# EAGLE board lasersupply_smd (EAGLE 5.11)
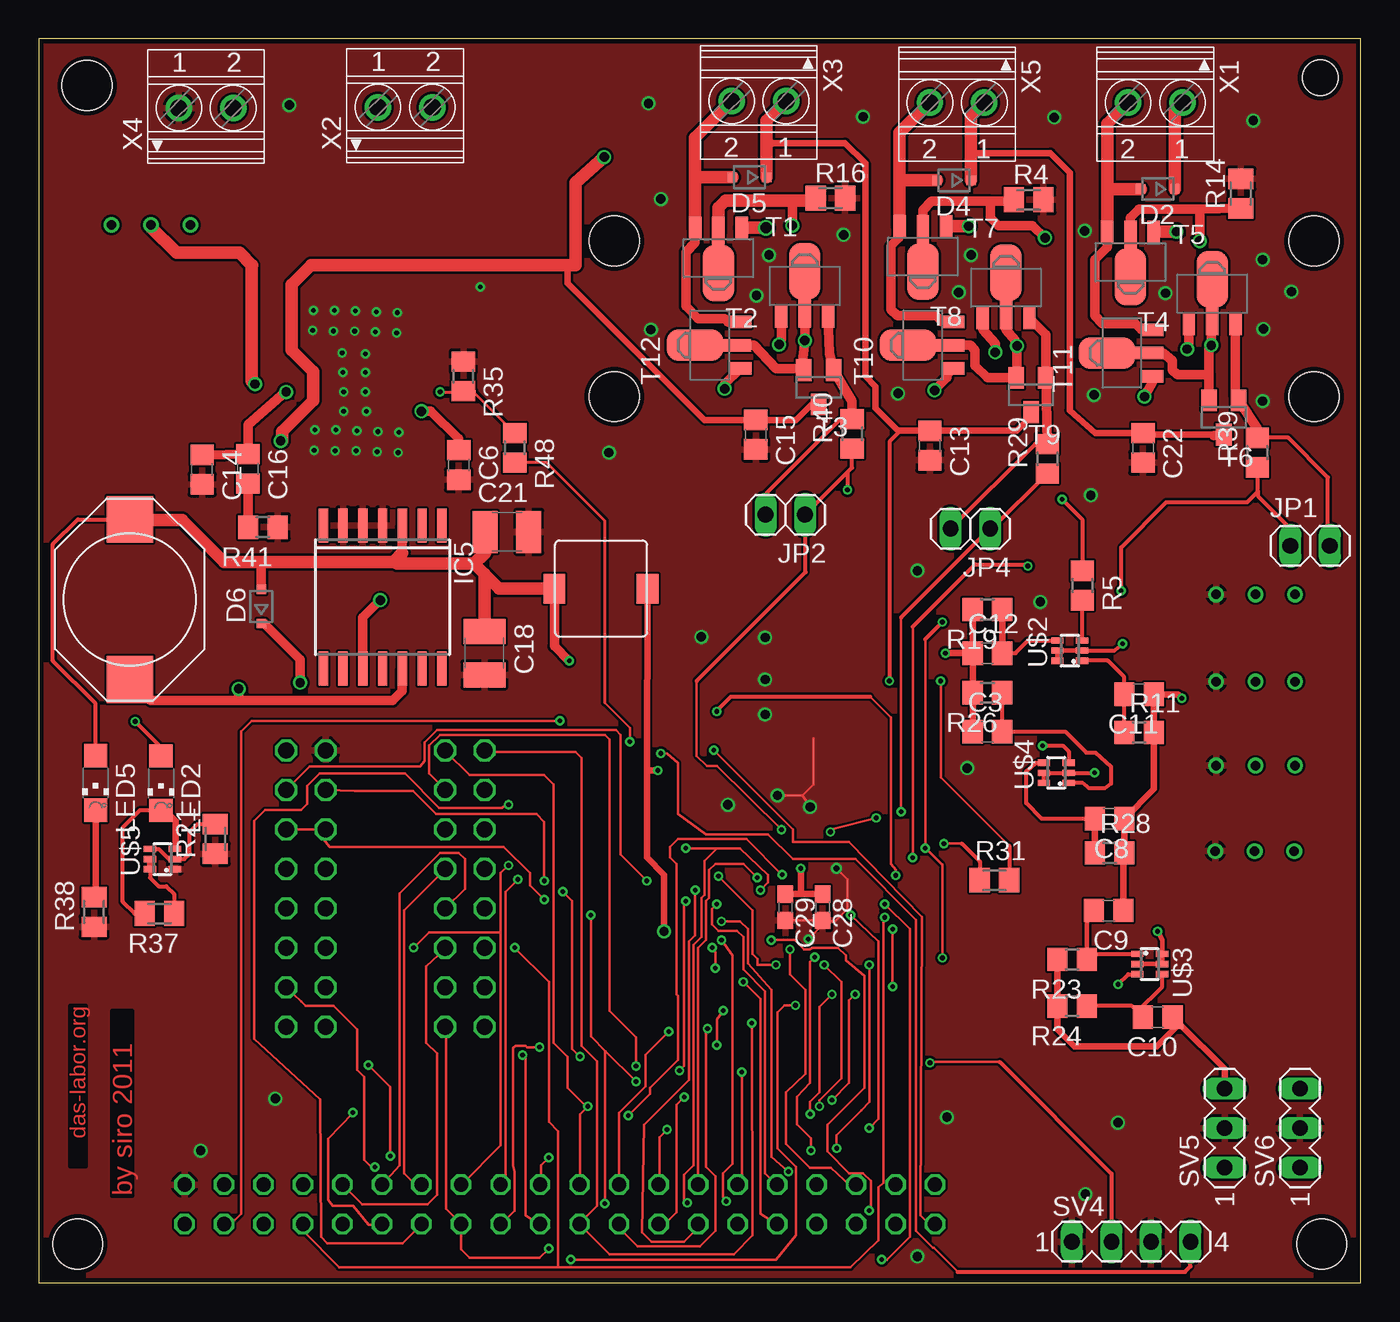
[diagram p0: board, top side]
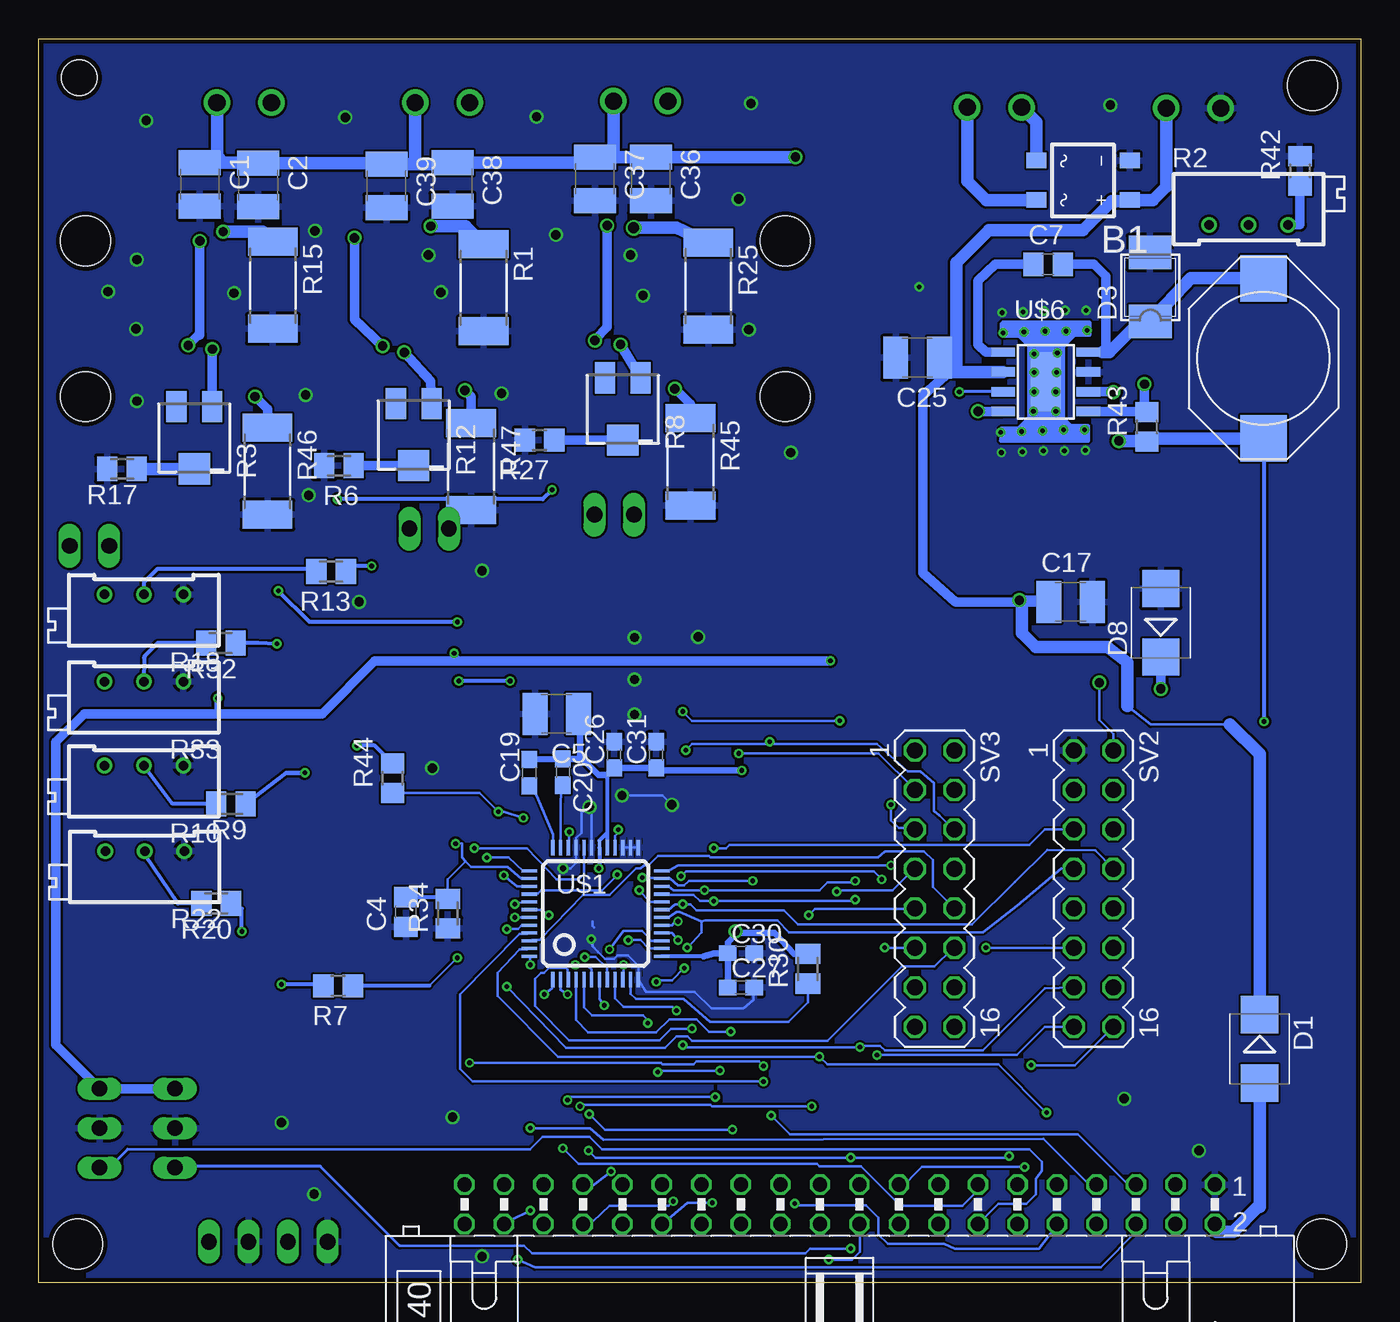
[diagram p1: board, bottom side, seen from below]

Size 85 x 80 mm. Coordinates in mm from the lower left corner, seen from the top.
Outline: 0,0 85,0 85,80 0,80 0,0
Copper layers (1*16): Top 0.035mm / dielectric 1.5mm / Bottom 0.035mm
Design rules "PCB-POOL Standard": minimum track width 0.15mm, minimum drill 0.3mm, track to track 0.15mm, track to pad 0.15mm, pad to pad 0.15mm, via to via 0.15mm, smd to smd 0.15mm, copper to edge 0.3mm, drill to drill 0.2mm, minimum pad ring 0.2mm, minimum via ring 0.15mm, stop-mask expansion 0.075mm, vias tented up to drill 0mil, thermal gap 0.2mm
Holes 3.2 mm at 82.5,2.5 82,57 3.1,77 2.5,2.5 37,57 37,67 82,67
Holes 2.3 mm at 82.4,77.5

## Footprints (pad centres in the part's own frame; a part is rotated, then mirrored left to right if it is on the bottom)
MBS = smd 1 x 1.3: + -1.27,-3; - 1.27,-3; AC1 -1.27,3; AC2 1.27,3
C1210 = smd 1.6 x 2.7: 1 -1.4,0; 2 1.4,0
C0805 = smd 1.3 x 1.5: 1 -0.95,0; 2 0.95,0
C0603 = smd 1.1 x 1: 1 -0.85,0; 2 0.85,0
SMB = smd 2.4 x 2.4: A 2.2,0; C -2.2,0
SOD323-R = smd 0.6 x 0.6: A 1.1,0; C -1.1,0
SMB' = smd 2.159 x 2.743: 1 -2.311,-0.127; 2 2.108,-0.102
SO14W = smd 0.6 x 2.2: 1 -3.81,-4.6; 2 -2.54,-4.6; 3 -1.27,-4.6; 4 0,-4.6; 5 1.27,-4.6; 6 2.54,-4.6; 7 3.81,-4.6; 8 3.81,4.6; 9 2.54,4.6; 10 1.27,4.6; 11 0,4.6; 12 -1.27,4.6; 13 -2.54,4.6; 14 -3.81,4.6
1X02 = drill 1.016 long: 1 -1.27,0; 2 1.27,0
PISM = smd 3 x 3: 1 -5.15,0; 2 5.15,0
PIS24XX = smd 1.4 x 1.9: 1 -3,0; 2 3,0
CHIPLED_1206 = smd 1.5 x 1.5: A 0,-1.75; C 0,1.75
R2512 = smd 1.8 x 3.2: 1 -2.8,0; 2 2.8,0
RTRIM64X = drill 0.61 round: 1 1.27,-2.54; 2 1.27,0; 3 1.27,2.54
SM-42/43A = smd 2 x 1.3: 1 2,1.15; 3 2,-1.15 | smd 2 x 2: 2 -2,0
M0805 = smd 1.3 x 1.6: 1 -0.95,0; 2 0.95,0
R0805 = smd 1.3 x 1.5: 1 -0.95,0; 2 0.95,0
ML40L = drill 0.914 octagon: 1 -24.13,-1.27; 2 -24.13,1.27; 3 -21.59,-1.27; 4 -21.59,1.27; 5 -19.05,-1.27; 6 -19.05,1.27; 7 -16.51,-1.27; 8 -16.51,1.27; 9 -13.97,-1.27; 10 -13.97,1.27; 11 -11.43,-1.27; 12 -11.43,1.27; 13 -8.89,-1.27; 14 -8.89,1.27; 15 -6.35,-1.27; 16 -6.35,1.27; 17 -3.81,-1.27; 18 -3.81,1.27; 19 -1.27,-1.27; 20 -1.27,1.27; 21 1.27,-1.27; 22 1.27,1.27; 23 3.81,-1.27; 24 3.81,1.27; 25 6.35,-1.27; 26 6.35,1.27; 27 8.89,-1.27; 28 8.89,1.27; 29 11.43,-1.27; 30 11.43,1.27; 31 13.97,-1.27; 32 13.97,1.27; 33 16.51,-1.27; 34 16.51,1.27; 35 19.05,-1.27; 36 19.05,1.27; 37 21.59,-1.27; 38 21.59,1.27; 39 24.13,-1.27; 40 24.13,1.27
MA08-2 = drill 1.016 octagon: 1 -8.89,-1.27; 2 -8.89,1.27; 3 -6.35,-1.27; 4 -6.35,1.27; 5 -3.81,-1.27; 6 -3.81,1.27; 7 -1.27,-1.27; 8 -1.27,1.27; 9 1.27,-1.27; 10 1.27,1.27; 11 3.81,-1.27; 12 3.81,1.27; 13 6.35,-1.27; 14 6.35,1.27; 15 8.89,-1.27; 16 8.89,1.27
MA04-1 = drill 1.016 long: 1 -3.81,0; 2 -1.27,0; 3 1.27,0; 4 3.81,0
MA03-1 = drill 1.016 long: 1 -2.54,0; 2 0,0; 3 2.54,0
SOT89-BEC = smd 0.8 x 1.4: B -1.499,-0.711; C 1.499,-0.711 | smd 0.8 x 1.9: E 0,-0.457 | smd 2.032 x 3.65: E@1 0,2.21
SOT23 = smd 1 x 1.4: 1 -0.95,-1.1; 2 0.95,-1.1; 3 0,1.1
LQFP48 = smd 0.2 x 1: 1 -2.75,-4.25; 2 -2.25,-4.25; 3 -1.75,-4.25; 4 -1.25,-4.25; 5 -0.75,-4.25; 6 -0.25,-4.25; 7 0.25,-4.25; 8 0.75,-4.25; 9 1.25,-4.25; 10 1.75,-4.25; 11 2.25,-4.25; 12 2.75,-4.25; 25 2.75,4.25; 26 2.25,4.25; 27 1.75,4.25; 28 1.25,4.25; 29 0.75,4.25; 30 0.25,4.25; 31 -0.25,4.25; 32 -0.75,4.25; 33 -1.25,4.25; 34 -1.75,4.25; 35 -2.25,4.25; 36 -2.75,4.25 | smd 1 x 0.2: 13 4.25,-2.75; 14 4.25,-2.25; 15 4.25,-1.75; 16 4.25,-1.25; 17 4.25,-0.75; 18 4.25,-0.25; 19 4.25,0.25; 20 4.25,0.75; 21 4.25,1.25; 22 4.25,1.75; 23 4.25,2.25; 24 4.25,2.75; 37 -4.25,2.75; 38 -4.25,2.25; 39 -4.25,1.75; 40 -4.25,1.25; 41 -4.25,0.75; 42 -4.25,0.25; 43 -4.25,-0.25; 44 -4.25,-0.75; 45 -4.25,-1.25; 46 -4.25,-1.75; 47 -4.25,-2.25; 48 -4.25,-2.75
SOT363_PHILIPS = smd 0.4 x 0.8: 1 -0.65,-0.8; 2 0,-0.8; 3 0.65,-0.8; 4 0.65,0.8; 5 0,0.8; 6 -0.65,0.8
SO8-COOL = smd 0.61 x 1.524: 1 -1.905,-2.743; 2 -0.635,-2.743; 3 0.635,-2.743; 4 1.905,-2.743; 5 1.905,2.743; 6 0.635,2.743; 7 -0.635,2.743; 8 -1.905,2.743 | smd 3.81 x 1.93: EXT 0,0
1751248 = drill 1.1 pad 1.7 round: 1 -1.75,-0.1; 2 1.75,-0.1

## Placement (x,y rotation side)
B1  B1S  [MBS]  17.85,70.9 90 bottom
C1  X5R-G1210 22  [C1210]  74.65,70.65 270 bottom
C2  X5R-G1210 22  [C1210]  70.9,70.6 270 bottom
C3  100n  [C0805]  61,35.45 0 top
C4  100n  [C0805]  61.4,23.85 90 bottom
C5  100µ  [C1210]  51.7,36.6 180 bottom
C6  15n  [C0805]  27,52.6 270 top
C7  100n  [C0805]  20.1,65.5 0 bottom
C8  100n  [C0805]  68.85,29.85 180 top
C9  100n  [C0805]  68.8,23.95 180 top
C10  100n  [C0805]  71.95,17.1 180 top
C11  100n  [C0805]  70.75,37.85 180 top
C12  100n  [C0805]  61,40.5 0 top
C13  X5R-G0805 4,7  [C0805]  57.3,53.85 270 top
C14  12p  [C0805]  10.5,52.3 270 top
C15  X5R-G0805 4,7  [C0805]  46.1,54.55 270 top
C16  200p  [C0805]  13.45,52.35 270 top
C17  10u, 60V max  [C1210]  18.65,43.8 0 bottom
C18  X5R-G1210 22  [C1210]  28.65,40.5 270 top
C19  100n  [C0603]  53.45,32.8 90 bottom
C20  100n  [C0603]  51.3,32.85 270 bottom
C21  X5R-G1210 22  [C1210]  30.1,48.3 0 top
C22  X5R-G0805 4,7  [C0805]  71,53.7 270 top
C25  10µ  [C1210]  28.5,59.5 180 bottom
C26  10n  [C0603]  48,33.95 90 bottom
C27  10n  [C0603]  39.85,19 0 bottom
C28  10n  [C0603]  50.4,24.15 270 top
C29  100n  [C0603]  48,24.15 270 top
C30  100n  [C0603]  39.85,21.2 0 bottom
C31  100n  [C0603]  45.3,33.95 90 bottom
C36  X5R-G1210 22  [C1210]  45.65,71 270 bottom
C37  X5R-G1210 22  [C1210]  49.25,71 270 bottom
C38  X5R-G1210 22  [C1210]  58.4,70.65 270 bottom
C39  X5R-G1210 22  [C1210]  62.65,70.55 270 bottom
D1  [SMB]  6.5,15.05 270 bottom
D2  ES2D  [SOD323-R]  71.95,70.35 180 top
D3  [SMB']  13.65,64.15 90 bottom
D4  ES2D  [SOD323-R]  58.85,70.9 180 top
D5  ES2D  [SOD323-R]  45.7,71.1 180 top
D6  ES2D  [SOD323-R]  14.3,43.5 90 top
D8  [SMB]  12.85,42.45 90 bottom
IC5  LM2574HVM-5.0  [SO14W]  22.1,44.1 180 top
JP1  [1X02]  81.75,47.4 0 top
JP2  [1X02]  48,49.4 180 top
JP4  [1X02]  59.9,48.5 180 top
L2  L-EUPISM 10µ  [PISM]  6.25,59.45 270 bottom
L4  22µ  [PIS24XX]  36.15,44.65 0 top
L5  L-PISM 680µ  [PISM]  5.85,43.95 90 top
LED2  [CHIPLED_1206]  7.86,32.13 180 top
LED5  [CHIPLED_1206]  3.65,32.15 180 top
R1  PT2.0YCT-ND - 2ohm  [R2512]  56.4,64 270 bottom
R2  1k - PV36X50  [RTRIM64X]  7.2,69.3 270 bottom
R3  100- ST32ETB101  [SM-42/43A]  75,54.35 90 bottom
R4  1k  [M0805]  63.65,69.65 0 top
R5  0  [R0805]  67.1,44.85 270 top
R6  2  [M0805]  65.7,52.55 180 bottom
R7  0  [R0805]  65.75,19.1 180 bottom
R8  100 - ST32ETB101  [SM-42/43A]  47.45,56.2 90 bottom
R9  700  [M0805]  72.65,30.8 180 bottom
R10  100k - PV36X104  [RTRIM64X]  78.25,32 90 bottom
R11  160  [R0805]  70.75,35.4 0 top
R12  100 - ST32ETB101  [SM-42/43A]  60.9,54.55 90 bottom
R13  530 1%  [M0805]  66.2,45.75 180 bottom
R14  1k  [M0805]  77.3,70.05 90 top
R15  PT2.0YCT-ND - 2ohm  [R2512]  69.95,64.15 270 bottom
R16  1k  [M0805]  50.9,69.75 0 top
R17  2  [M0805]  79.65,52.35 180 bottom
R18  1k - PV36X102  [RTRIM64X]  78.25,43 90 bottom
R19  160  [R0805]  61,43.3 180 top
R20  700  [M0805]  73.6,24.4 180 bottom
R21  62  [M0805]  11.35,28.55 90 top
R22  100k - PV36X104  [RTRIM64X]  78.19,26.5 90 bottom
R23  160  [R0805]  66.45,20.8 180 top
R24  160  [R0805]  66.45,17.8 180 top
R25  PT2.0YCT-ND -2ohm  [R2512]  41.95,64.1 270 bottom
R26  160  [R0805]  61,37.95 180 top
R27  2  [R0805]  52.8,54.2 180 bottom
R28  160  [R0805]  68.85,27.65 0 top
R29  1  [R0805]  64.85,53 90 top
R30  1k  [M0805]  35.55,20.2 90 bottom
R31  10k  [M0805]  61.45,25.9 0 top
R32  700  [M0805]  73.3,41.15 180 bottom
R33  100k - PV36X104  [RTRIM64X]  78.25,37.4 90 bottom
R34  10k  [M0805]  58.7,23.75 90 bottom
R35  34k  [R0805]  27.3,58.3 270 top
R37  4k7  [M0805]  7.75,23.75 180 top
R38  1.2k  [M0805]  3.55,23.85 90 top
R39  1  [R0805]  78.35,53.4 90 top
R40  1  [R0805]  52.3,54.6 90 top
R41  191k  [R0805]  14.4,48.6 180 top
R42  700  [R0805]  3.9,71.5 90 bottom
R43  10k  [R0805]  13.75,55.05 90 bottom
R44  0  [R0805]  62.25,32.45 90 bottom
R45  PT2.0YCT-ND -2ohm  [R2512]  43.1,52.8 270 bottom
R46  PT2.0YCT-ND - 2ohm  [R2512]  70.3,52.2 270 bottom
R47  PT2.0YCT-ND - 2ohm  [R2512]  57.2,52.5 270 bottom
R48  50k  [R0805]  30.6,53.7 270 top
SV1  [ML40L]  33.5,5.05 180 bottom
SV2  [MA08-2]  17.18,25.35 270 bottom
SV3  [MA08-2]  27.4,25.35 270 bottom
SV4  [MA04-1]  70.25,2.65 0 top
SV5  [MA03-1]  76.25,9.95 90 top
SV6  [MA03-1]  81.1,9.95 90 top
T1  NESG270034  [SOT89-BEC]  49.25,62.85 0 top
T2  NESG270034  [SOT89-BEC]  43.7,67.15 180 top
T3  BC847  [SOT23]  50.15,57.6 180 top
T4  NESG270034  [SOT89-BEC]  70.2,66.9 180 top
T5  NESG270034  [SOT89-BEC]  75.45,62.35 0 top
T6  BC847  [SOT23]  76.2,55.65 180 top
T7  NESG270034  [SOT89-BEC]  62.2,62.75 0 top
T8  NESG270034  [SOT89-BEC]  56.85,67.25 180 top
T9  BC847  [SOT23]  63.8,57.1 180 top
T10  NESG270034  [SOT89-BEC]  58.1,60.3 90 top
T11  NESG270034  [SOT89-BEC]  70.9,59.8 90 top
T12  NESG270034  [SOT89-BEC]  44.4,60.3 90 top
U$1  ADV7123  [LQFP48]  49.2,23.75 0 bottom
U$2  MMDT3906SOT363  [SOT363_PHILIPS]  66.3,40.66 90 top
U$3  MMDT3906SOT363  [SOT363_PHILIPS]  71.44,20.5 270 top
U$4  MMDT3906SOT363  [SOT363_PHILIPS]  65.43,32.8 90 top
U$5  MMDT3904  [SOT363_PHILIPS]  7.95,27.25 90 top
U$6  TPS54332  [SO8-COOL]  20.25,57.95 270 bottom
X1  1751248  [1751248]  71.8,75.8 180 top
X2  1751248  [1751248]  23.55,75.7 0 top
X3  1751248  [1751248]  46.3,75.9 180 top
X4  1751248  [1751248]  10.75,75.65 0 top
X5  1751248  [1751248]  59.05,75.8 180 top

## Library data of the parts
B1 = rectifier
C1-C22 C25-C31 C36-C39 R2 R5-R7 R10 R11 R13 R18 R19 R21-R24 R26-R31 R33-R35 R37-R44 R48 = rcl
D1 D2 D4-D6 D8 = diode
D3 = semicon-smd-ipc
IC5 = linear
JP1 JP2 JP4 = pinhead
L2 L4 L5 = Inductor-Fastron
LED2 LED5 = led
R1 R4 R9 R14-R17 R20 R25 R32 R45-R47 = resistor
R3 R8 R12 = pot
SV1 = con-ml; OC_FARNELL: unknown; OC_NEWARK: unknown
SV2-SV6 = con-lstb; OC_FARNELL: unknown; OC_NEWARK: unknown
T1 T2 T4 T5 T7 T8 T10-T12 U$1-U$6 = Labor
T3 T6 T9 = transistor
X1-X5 = con-phoenix-350

## Nets
+5V: C3.1 C8.1 C9.1 C10.1 C11.1 C12.1 C18.1 C21.1 D6.A IC5.3 L4.1 L5.2 LED5.A R11.2 R19.2 R23.2 R24.2 R26.2 R28.2 SV5.3 SV6.3
A0: SV1.4 U$1.39
A1: SV1.5 U$1.40
A2: SV1.6 U$1.41
A3: SV1.7 U$1.42
A4: SV1.8 SV3.11 U$1.43
A5: SV1.9 SV3.12 U$1.44
A6: SV1.10 SV3.9 U$1.45
A7: SV1.11 SV3.10 U$1.46
A8: SV1.12 SV3.7 U$1.47
A9: SV1.13 SV3.8 U$1.48
A_OUT: JP4.1 R29.1 R44.1 U$1.34
B0: SV1.26 U$1.1
B1: SV1.25 U$1.2
B2: SV1.24 U$1.3
B3: SV1.23 U$1.4
B4: SV1.22 SV3.1 U$1.5
B5: SV1.21 SV3.2 U$1.6
B6: SV1.20 SV2.15 U$1.7
B7: SV1.19 SV2.16 U$1.8
B8: SV1.18 SV2.13 U$1.9
B9: SV1.17 SV2.14 U$1.10
B_OUT: JP1.1 R7.1 R39.1 U$1.32
C0: SV1.38 U$1.14
C1: SV1.35 U$1.15
C2: SV1.34 U$1.16
C3: SV1.33 U$1.17
C4: SV1.32 SV2.7 U$1.18
C5: SV1.31 SV2.8 U$1.19
C6: SV1.30 SV2.5 U$1.20
C7: SV1.29 SV2.6 U$1.21
C8: SV1.28 SV2.3 U$1.22
C9: SV1.27 SV2.4 U$1.23
C_OUT: JP2.1 R5.1 R40.1 U$1.28
CLOCK: SV1.15 SV2.11 U$1.24
GND: B1.- C1.2 C2.2 C4.1 C5.2 C6.2 C13.2 C14.2 C15.2 C17.2 C18.2 C21.2 C22.2 C25.2 C26.2 C27.2 C28.2 C29.2 C30.2 C31.2 C36.2 C37.2 C38.2 C39.2 D3.2 D8.A IC5.4 IC5.5 IC5.6 R1.2 R4.2 R6.2 R10.1 R14.2 R15.2 R16.2 R17.2 R18.1 R21.1 R22.1 R25.2 R27.2 R33.1 R34.1 R35.1 R38.1 R41.1 R42.2 R45.2 R46.2 R47.2 SV1.1 SV2.1 SV4.1 SV4.3 SV5.2 SV6.2 U$1.12 U$1.25 U$1.26 U$1.27 U$1.31 U$1.33 U$5.1 U$6.7 U$6.EXT X4.1
HSYNC: SV1.16 SV3.16 SV5.1
IO1: SV3.3 SV4.4
IO2: SV3.4 SV4.2
LASERONOFF: R48.2 SV1.40 SV3.6
N$1: R1.1 T8.B
N$2: R30.1 U$1.11
N$3: R3.3 T5.B
N$4: C19.1 U$1.36
N$5: R3.2 R17.1
N$6: B1.AC1 X2.2
N$7: B1.AC2 X2.1
N$8: C16.2 R41.2
N$9: R2.3 R42.1
N$10: R4.1 T7.E T8.E T9.2 T10.E
N$11: C20.2 U$1.35
N$12: R2.2 R43.2 U$6.5
N$13: R8.3 T1.B
N$14: R8.2 R27.1
N$15: D8.C IC5.12 L5.1
N$16: R9.2 R10.2
N$17: C6.1 U$6.4
N$18: R12.3 T7.B
N$19: C11.2 R11.1 U$2.1
N$20: R15.1 T4.B
N$21: R14.1 T4.E T5.E T6.2 T11.E
N$22: R6.1 R12.2
N$23: B1.+ C17.1 C25.1 D1.C IC5.10 U$6.2 X4.2
N$24: R20.2 R22.2
N$25: R32.2 R33.2
N$26: R20.1 U$3.2 U$3.5 U$3.6
N$27: R9.1 U$4.2 U$4.5 U$4.6
N$28: C12.2 R19.1 U$2.4
N$29: R13.1 U$1.37
N$30: R13.2 R18.2
N$31: C9.2 R23.1 U$3.1
N$32: R16.1 T1.E T2.E T3.2 T12.E
N$33: C10.2 R24.1 U$3.4
N$34: C4.2 R31.1 R34.2 U$1.38
N$35: R7.2 U$3.3
N$36: R32.1 U$2.2 U$2.5 U$2.6
N$37: C5.1 C19.2 C20.1 C26.1 C27.1 C28.1 C29.1 C30.1 C31.1 L4.2 R30.2 U$1.13 U$1.29 U$1.30
N$38: C3.2 R26.1 U$4.1
N$39: C8.2 R28.1 U$4.4
N$40: R5.2 U$2.3
N$41: R25.1 T2.B
N$42: JP1.2 R39.2 T5.C T6.1
N$43: R37.1 U$5.5 U$5.6
N$44: LED2.C R37.2 U$5.3
N$45: R21.2 U$5.2 U$5.4
N$46: JP4.2 R29.2 T7.C T9.1
N$47: LED5.C R38.2
N$48: JP2.2 R40.2 T1.C T3.1
N$49: R44.2 U$4.3
N$50: C7.1 U$6.1
N$51: C7.2 D3.1 L2.1 U$6.8
N$52: C14.1 C16.1 U$6.6
N$53: R45.1 T12.B
N$54: R47.1 T10.B
N$55: R46.1 T11.B
N$56: D4.A T8.C T10.C X5.2
N$58: R35.2 R48.1 U$6.3
N$62: SV3.15
N$67: SV2.12
N$82: D2.A T4.C T11.C X1.2
N$84: D5.A T2.C T12.C X3.2
VDD_EXT3.3: SV1.3
VDD_EXT5V: D6.C SV2.2
VDD_LASERSUPPLY: C1.1 C2.1 C13.1 C15.1 C22.1 C36.1 C37.1 C38.1 C39.1 D2.C D4.C D5.C L2.2 LED2.A R31.2 R43.1 T3.3 T6.3 T9.3 X1.1 X3.1 X5.1
VSYNC: SV1.14 SV3.5 SV6.1
VU: D1.A SV1.2

## Tracks (layer width: path | path; a pad name or v marks a point on that pad's centre or on a via)
+5V  (via drill 0.3)
  Top 0.254: LED5.A 3.65,37.25 0.9,40 0.9,47.5 2.5,49.1 L5.2
  Top 0.305: R24.2 65.55,17.75
  Top 0.406: R24.2 R23.2 65.5,16.3 66.6,15.2 71.9,15.2 73.35,16.65 | C12.1 R19.2 | C3.1 R26.2 C12.1 | v58.3,40.5 C12.1 | v73.5,37.6 73.25,37.85 C11.1 R11.2 71.7,31.75 C8.1 R28.2 69.75,27.6 C9.1 | SV5.3 76.25,13.75 73.35,16.65 | 73.35,16.65 C10.1
  Top 0.61: 23.37,46.92 IC5.3 | L5.2 5.9,49.05 | D6.A 14.3,46.25 14.2,46.35 | L4.1 33.15,40.95 v34.1,40
  Top 0.813: 22.88,46.42 22.8,46.35 14.2,46.35 11.9,46.35 9.2,49.05 5.9,49.05 | 22.88,46.42 23.37,46.92 | 28.65,45.6 C18.1 | 28,46.25 28.65,45.6 | 28,46.25 23.05,46.25 22.88,46.42 | C21.1 28.7,46.95 28,46.25 | L4.1 29.6,44.65 28.65,45.6
  Bottom 0.406: v58.3,40.5 58.4,40.5 57.9,40 | v73.5,37.6 73.5,36.8 73.7,36.6
  Bottom 0.61: v34.1,40 57.9,40 63.4,40 66.8,36.6 73.7,36.6 82.1,36.6 83.9,34.8 83.9,15.29 SV6.3 SV5.3
A0  (via drill 0.3)
  Top 0.15: v33.5,36.15 13.7,36.15 13,35.45 13,4.45 12,3.45 SV1.4 | v55.1,26.2 55.1,26.55 54.8,26.95 54.8,36.35 53.45,37.7
  Top 0.254: v43.6,36.75 43.6,36.8 44.5,37.7 53.45,37.7
  Bottom 0.15: v43.6,36.75 43,36.15 v33.5,36.15 | U$1.39 54.25,25.5 v55.1,26.2
A1  (via drill 0.3)
  Top 0.15: v47.8,26.25 45.5,28.55 41.1,28.55 40.6,28.05 40.6,27.35 41,26.95 41,18.55 41.1,18.45 41.1,14.35 39.3,12.55 39.3,12.15 v37.9,10.75
  Bottom 0.15: v47.8,26.25 48.8,25.25 52.7,25.25 52.9,25.05 53.4,25.05 U$1.40 | v37.9,10.75 36.7,9.55 18.2,9.55 14.6,5.95 14.5,5.95 SV1.5
A2  (via drill 0.3)
  Top 0.15: v54.4,24.35 56,22.75 56,2.95 54.55,1.5 v54.2,1.5
  Bottom 0.15: v54.4,24.35 54.2,24.45 U$1.41 | v54.2,1.5 53.1,1 16.7,1 14.4,3.35 SV1.6
A3  (via drill 0.3)
  Top 0.15: v52.2,23.65 54,21.95 54,10.55 v53.4,9.95
  Bottom 0.15: v53.4,9.95 49.55,9.95 48.7,9.2 20.4,9.25 17.1,5.95 17,5.95 SV1.7 | U$1.42 52.75,24 v52.2,23.65
A4  (via drill 0.3)
  Top 0.15: v54.4,23.5 54.3,23.25 54.3,6.45 54,6.15 54,2.75 52.2,1 33.4,1 | 33.4,1 19.3,1 17,3.35 SV1.8 | v30.6,21.55 32.8,19.35 32.8,10.35 33.4,9.75 33.4,1
  Bottom 0.15: v54.4,23.5 U$1.43 | v30.6,21.55 28.7,21.55 SV3.11
A5  (via drill 0.3)
  Top 0.15: v54.9,19.05 v54.9,22.75 | SV1.9 20.8,5.05 25,5.05 25.6,5.65 25.6,14.75 24.9,15.45 24.9,20.35 26.1,21.45 SV3.12
  Bottom 0.15: v54.9,22.75 54.2,22.75 54,22.95 53.5,22.95 U$1.44 | v54.9,19.05 51.1,15.1 44.75,15.1 44,15.85 43.3,15.85 43,15.55 34.3,15.55 29.5,20.35 27.4,20.35 26.3,21.45 26.2,21.45 SV3.12
A6  (via drill 0.3)
  Top 0.15: 36.45,14.9 35.5,15.85 v35.5,23.65 | 36.45,14.9 v38.4,12.95 | 36.45,14.9 36.4,14.85 36.4,5.3 v36.4,5.1
  Bottom 0.15: v38.4,12.95 57.1,12.95 57.9,13.75 57.9,18.55 54.1,22.45 53.6,22.45 U$1.45 | v35.5,23.65 35.1,24.05 28.7,24.05 SV3.9 | SV1.10 19.4,3.85 20.7,2.2 26.1,2.2 26.8,2.5 30.4,2.5 31,3.1 31,4.2 31.8,5 36.3,5 v36.4,5.1
A7
  Top 0.15: SV1.11 23.2,7.55 23.2,25.05 25.8,27.65 27,27.65 27.4,27.25 27.4,25.35 SV3.10
  Bottom 0.15: U$1.46 53.3,22.05 52.8,22.05 50,24.95 48.3,24.95 46.6,26.65 46.3,26.65 46.1,26.85 45.8,26.85 45.2,27.45 41.9,27.45 41.8,27.35 31.05,27.35 30.6,27.75 28.1,27.75 27.5,27.2 27.5,25.45 SV3.10
A8  (via drill 0.3)
  Top 0.15: v34.8,14.55 34.3,15.05 34.3,24.55 v33.7,25.15 | v20.2,10.95 18.6,9.25 18.6,5.35 18.9,4.95 20.2,4.95 21.2,3.75 22,3.75 SV1.12
  Bottom 0.15: v33.7,25.15 33.6,25.25 30.1,25.25 28.8,26.55 28.7,26.55 SV3.7 | U$1.47 53.6,21.45 54.1,21.45 55.5,19.95 55.5,18.45 51.6,14.55 v34.8,14.55 34.3,14.05 23.3,14.05 v20.2,10.95
A9  (via drill 0.3)
  Top 0.15: v53.4,20.45 53.4,11.65 52.9,11.1 51.3,9.5 v51.3,8.65 | SV3.8 26.1,26.55 23.5,23.95 23.5,7.05 24.6,5.95 SV1.13
  Bottom 0.15: v53.4,20.45 53.4,20.95 U$1.48 | v51.3,8.65 50.3,7.65 34.95,7.65 34.8,7.5 32.15,7.5 29.6,4.95 25.6,4.95 24.7,5.85 SV1.13
A_OUT  (via drill 0.3)
  Top 0.15: v50.9,29 51.05,29.2 v53.85,29.9 | v55.45,30.3 55.45,42.78
  Top 0.254: 55.45,42.78 JP4.1 61.3,48.5 R29.1
  Bottom 0.15: U$1.34 v50.9,29 | v53.85,29.9 55.05,30.3 v55.45,30.3 56.65,31.5 R44.1
B0  (via drill 0.3)
  Top 0.15: v52.5,18.55 52.1,18.15 52.1,12.85 v51,11.75 | v41.5,11.95 41,11.45 41,4.55 39.9,3.45 SV1.26
  Bottom 0.15: v52.5,18.55 52,18.95 U$1.1 | v51,11.75 50.8,11.95 v41.5,11.95
B1  (via drill 0.3)
  Top 0.15: v51,18.55 50.2,17.75 50.2,12.25 49.6,11.65 v49.6,10.85 | v40.4,9.85 39.9,9.35 39.9,5.95 SV1.25
  Bottom 0.15: v51,18.55 51.45,18.85 U$1.2 | v49.6,10.85 48.6,9.85 v40.4,9.85
B2  (via drill 0.3)
  Top 0.15: v43,16.35 42.9,16.25 42.9,7.45 43.5,6.85 43.5,3.35 42.5,2.35 38.5,2.35 37.3,3.55 SV1.24
  Bottom 0.15: v43,16.35 44.35,16.35 45.1,15.6 50.9,15.6 53.1,17.8 53.1,19.55 52.7,19.95 52.5,19.95 52.2,20.25 51.1,20.25 51,20.15 51,19.55 U$1.3
B3  (via drill 0.3)
  Top 0.15: v40.5,16.15 39,14.65 39,12.65 37.3,10.95 37.3,5.95 SV1.23
  Bottom 0.15: v40.5,16.15 41.9,16.15 42.7,16.95 44.45,16.95 45.3,16.1 49.7,16.1 50.45,16.9 U$1.4
B4  (via drill 0.3)
  Top 0.15: v45.85,16.7 45.85,16.5 45.9,3.05 44.7,1.85 37.1,1.85 36.7,1.85 SV1.22 34.8,3.85 35.9,4.95 35.9,14.25 34.9,15.25 34.9,33.75 34.5,34.15 28.7,34.15 SV3.1
  Bottom 0.15: U$1.5 49.93,19.45 49.93,17.7 49.43,17.2 46.15,17.2 45.85,16.9 v45.85,16.7
B5  (via drill 0.3)
  Top 0.15: v50.5,20.45 51.6,19.35 51.6,13.15 50.2,11.75 v50.2,11.35 | SV1.21 34.8,5.95 34.8,10.85 v35.3,11.35 35.2,11.35 34,12.55 34,14.55 33.1,15.45 33.1,32.05 32.5,32.65 27.7,32.65 26.2,34.15 SV3.2
  Bottom 0.15: v50.5,20.45 50.4,20.35 49.7,20.35 49.45,20.15 U$1.6 | v50.2,11.35 50.1,11.45 41.8,11.45 41.7,11.35 v35.3,11.35
B6  (via drill 0.3)
  Top 0.15: v48.65,17.85 47.95,17.85 47.5,17.4 47.5,8.65 48.7,7.45 48.7,3.05 47.4,1.5 34.8,1.5 v34.2,1.5 | v31.1,14.65 31.3,14.45 31.3,4.35 v32.2,3.75 SV1.20
  Bottom 0.15: v48.65,17.85 48.95,18.25 U$1.7 | v31.1,14.65 22.1,14.65 20.3,16.45 SV2.15 | v34.2,1.5 32.7,1.5 32.2,2 v32.2,3.75
B7  (via drill 0.3)
  Top 0.15: v49.9,20.95 49.6,20.65 49.6,12.85 48.75,11.95 48.75,10.2 49.65,9.3 v49.65,8.5 | v32.8,8.05 32.3,7.55 32.3,6.55 SV1.19 | v22.6,8.15 22.6,12.6 v21.2,14
  Bottom 0.15: v49.9,20.95 49.2,20.95 48.45,20.25 U$1.8 | v49.65,8.5 49.2,8.05 v32.8,8.05 22.9,8.05 v22.6,8.15 | v21.2,14 18.37,14 SV2.16
B8  (via drill 0.3)
  Top 0.15: v44,17.5 43.6,16.95 v43.6,15.3 | v32.2,15.15 31.4,15.15 31.3,15.25 30.65,15.25 30.5,15.1 30.5,7.55 30.6,7.15 30.6,4.65 29.7,3.75 SV1.18
  Bottom 0.15: v43.6,15.3 43.45,15.15 v32.2,15.15 32,15.25 30.9,15.25 30.6,14.95 24.3,14.95 20.3,18.95 SV2.13 | U$1.9 47.95,18.3 47.4,17.75 44.25,17.75 v44,17.5
B9  (via drill 0.3)
  Top 0.15: v47.4,20.45 46.2,20.45 46.2,20.85 45.9,21.15 45.9,23.95 v43.7,26.15 | v30.8,25.95 30,25.15 30,6.25 29.7,5.95 SV1.17 | SV2.14 16.85,18.1 17.15,17.8 18.95,17.8 20.45,16.3 20.45,13.7 20.9,13.25 20.9,7.9 21.35,7.45 v21.6,7.45
  Bottom 0.15: v47.4,20.45 47.4,19.55 U$1.10 | v43.7,26.15 43.4,26.45 31.3,26.45 v30.8,25.95 | v21.6,7.45 28.2,7.45 29.7,5.95 SV1.17
B_OUT  (via drill 0.3)
  Top 0.15: 58.1,26.85 v58.1,20.9 | v57,27.95 58.1,26.85 | 58.1,26.85 58.1,26.9 57,28 57,41.4
  Top 0.254: 57,41.4 v58.1,42.5 | v69.6,44.5 69.6,47.3 72.5,50.2 77.7,50.2 78.4,50.9 | 78.4,50.9 78.4,50.6 80.48,48.52 JP1.1 | 78.4,50.9 78.4,52.4 R39.1
  Bottom 0.15: v57,27.95 53.6,27.95 51.7,25.95 50.25,25.95 49.95,26.3 U$1.32 | v58.1,20.9 59.9,19.1
  Bottom 0.254: 59.9,19.1 R7.1 | v58.1,42.5 67.6,42.5 v69.6,44.5
C0  (via drill 0.3)
  Top 0.15: v53.4,4.65 53.5,4.75 53.5,6.55 53,7.05 52.1,7.05 50.7,8.45 50.7,10.15 53.1,12.55 53.1,19.75 51.9,20.75 51.9,21.05 51.4,21.55 49.7,21.55 49.6,21.45 49.2,21.45 48.6,22.05 v47.1,22.05
  Bottom 0.15: v47.1,22.05 46.3,22.05 45.8,21.5 U$1.14 | v53.4,4.65 54.6,4.05 55,4.05 SV1.38
C1  (via drill 0.3)
  Top 0.15: v48.3,21.45 48.3,19.85 49.3,18.85 49.3,13.45 48.05,12.25 48.05,8.95 49.6,7.4 50.95,7.4 52.2,6.25 SV1.35
  Bottom 0.15: v48.3,21.45 47.4,22.65 46.2,22.65 45.6,22 U$1.15
C2  (via drill 0.3)
  Top 0.15: v43.9,22.05 44.6,21.05 44.6,7.65 44,7.05 44,5.55 v44.2,5.25
  Bottom 0.15: v43.9,22.05 44.3,22.5 U$1.16 | v44.2,5.25 44.5,4.95 48.3,4.95 49.9,3.45 50,3.45 SV1.34
C3  (via drill 0.3)
  Top 0.15: v43.9,23.25 45.1,23.25 45.6,22.75 45.6,20.55 47.1,18.85 47.1,8.1 v48.2,7.15
  Bottom 0.15: v43.9,23.25 44.1,23.25 44.3,23 U$1.17 | v48.2,7.15 49.65,6.05 50,5.85 SV1.33
C4  (via drill 0.3)
  Top 0.15: v45.3,19.35 46.4,18.25 46.4,4.45 SV1.32 | v43.3,21.55 43.5,21.25 v43.5,20.25
  Bottom 0.15: v43.3,21.55 42.4,22.55 42.4,23.25 | v43.5,20.25 44.3,19.45 45.3,19.45 v45.3,19.35 | U$1.18 44.5,23.5 44,23.85 43.8,23.85 42.4,23.25 | 42.4,23.25 42.15,23.3 37.5,23.3 36.75,22.55 24.3,22.55 22.1,24.25 19.25,26.64 SV2.7
C5  (via drill 0.3)
  Top 0.15: v43.6,24.35 43.3,24.05 43.3,23.05 43.7,22.65 44.9,22.65 45.3,22.25 45.3,20.15 46.7,18.75 46.7,7.05 47.4,6.35 SV1.31
  Bottom 0.15: U$1.19 44.5,24 44.1,24.35 v43.6,24.35 43.1,24.35 42.7,23.95 37.1,23.95 36.2,23.05 25,23.05 22.25,25.8 20.15,27.85 17.06,27.8 SV2.8
C6  (via drill 0.3)
  Top 0.15: v46.4,25.25 46.9,25.75 46.9,26.25 45.1,27.95 43.6,27.95 | 43.6,27.95 42.8,27.15 42.8,24.95 42.6,24.75 42.6,22.25 42.1,21.75 42.1,7.55 41.5,6.95 41.5,5.35 v41.7,5.15 | 43.6,27.95 v41.6,27.95
  Bottom 0.15: v46.4,25.25 45.7,24.5 U$1.20 | v41.7,5.15 43.3,5.15 SV1.30 | v41.6,27.95 40.8,27.95 40.6,28.15 21.3,28.15 20.3,29.15 SV2.5
C7  (via drill 0.3)
  Top 0.15: v32.5,24.65 31.6,25.55 31.6,26.35 29.9,28.05 18.7,28.05 17.8,29.15 SV2.6 | v45.2,13.55 45.2,6.55 45,6.35 SV1.29 | v41.2,13.65 41.5,13.95 41.5,24.45 v41.6,24.55
  Bottom 0.15: v32.5,24.65 32.6,24.55 v41.6,24.55 42.5,24.55 42.9,24.95 44.8,24.95 U$1.21 | v45.2,13.55 45.1,13.65 v41.2,13.65
C8  (via drill 0.3)
  Top 0.15: v42.2,25.25 42.2,22.35 41.8,21.95 41.8,13.05 38.9,10.15 38.8,3.25 39.4,2.65 41.5,2.65 42.4,3.55 SV1.28 | v32.5,25.85 32.5,29.65 32,30.15 25.55,30.15 24.05,31.65 20.3,31.65 SV2.3
  Bottom 0.15: 45,25.5 U$1.22 44.5,25.5 44.2,25.25 v42.2,25.25 34.8,25.25 34.3,25.75 32.6,25.75 v32.5,25.85
C9  (via drill 0.3)
  Top 0.15: v46.2,26.05 45.3,26.95 43.5,26.95 43.1,26.55 43.1,24.75 42.9,24.55 42.9,22.05 42.4,21.55 42.4,5.95 SV1.27 | v39.1,25.85 37.4,27.55 37.4,35.25 37.1,35.55 25.6,35.55 24.8,34.75 24.8,33.55 24.5,33.2 17.4,33.2 SV2.4
  Bottom 0.15: v46.2,26.05 45.1,26.05 U$1.23 44.4,26 43.9,25.55 43.5,25.55 43.2,25.85 v39.1,25.85
C_OUT  (via drill 0.3)
  Top 0.15: v47.75,29.15 43.6,33.25 43,33.25 42.95,33.25 42.3,33.9 42.3,38.7
  Top 0.254: R40.1 52.3,52.43 52,52.13 | 52,52.13 JP2.1 49.3,49.37 49.3,45.7 42.3,38.7 | R5.1 67.1,49.1 v65.8,50.4 | 52,52.13 v52,51
  Bottom 0.15: v47.75,29.15 47.75,28.95 47.95,28.75 47.95,28.05 U$1.28
  Bottom 0.254: v65.8,50.4 52.6,50.4 v52,51
CLOCK  (via drill 0.3)
  Top 0.15: v30.2,26.85 29.7,26.35 29.7,22.55 | 29.7,22.55 29.7,8.85 27.2,6.35 SV1.15 | v24.1,21.55 25.1,22.55 29.7,22.55
  Bottom 0.15: v30.2,26.85 43.9,26.85 44.4,26.55 U$1.24 | v24.1,21.55 20.3,21.55 SV2.11
GND  (via drill 0.3, 0.4, 0.6)
  Top 0.15: 48,23.25 C29.2 C28.2 | C28.2 50.7,23.25 51.2,23.25 52,24.05 52,25.95 v51.3,26.65 | v49.6,30.6 49.1,31.35 | 49.1,31.35 v47.5,31.35 | 49.1,31.35 49.8,32.05 49.8,35 | C28.2 50.4,23.03 v49.48,22.11
  Bottom 0.15: v47.5,31.35 44.9,31.35 v44.3,30.75 | U$1.31 49.45,30.1 v49.6,30.6 50.1,30.25 50.1,28.95 50.45,28.6 U$1.33 50.45,27 50.8,26.65 v51.3,26.65 | 49.05,21.3 48.6,20.85 48,20.85 47.8,21.05 47.1,21.05 46.45,20.4 U$1.12 45.95,18.7 42.85,18.7 41.75,17.65 39.7,17.65 39.05,18.2 C27.2 | 49.05,21.3 49.4,21.65 v49.48,22.11 49.38,21.63 49.05,21.3 | 49.4,23.25 49.4,22.95 49.3,22.85 | U$1.25 U$1.27
  other vias: 67.85,57.1 65.3,74.95 78.1,74.75 78.7,65.8 78.7,56.7 16.1,75.75 56.5,45.8 42.6,41.55 46.7,36.55 10.4,8.5 59.7,33.1 58.4,10.65 15.2,11.85 36.65,53.4 46.7,38.8 51.75,67.4 67.25,67.65 53,75 40,69.7 39.2,75.85 78.75,61.35 39.35,61.3 28.4,64.05 17.75,54.85 19.1,54.85 20.45,54.8 21.8,54.75 23.15,54.7 17.7,53.55 19.05,53.5 20.4,53.5 21.75,53.45 23.1,53.4 19.6,56.05 21.05,56.05 19.5,59.8 21,59.75 21,58.55 19.55,58.55 21,57.3 19.6,57.3 80.55,63.75 72.45,63.65 67.65,50.65 59.95,66.1 59.15,63.7 55.25,57.2 46.95,66.1 46.15,63.5 46.7,41.5 64.4,43.8 69.4,10.3 56.5,1.7 67.3,5.7 17.65,62.55 19,62.55 20.35,62.5 21.7,62.45 23.05,62.4 17.6,61.25 18.95,61.2 20.3,61.2 21.65,61.15 23,61.1
  pour Top: 0,0 85,0 85,80 0,80
  pour Bottom: 0,0 85,0 85,80 0,80
HSYNC  (via drill 0.3)
  Top 0.15: SV3.16 26.2,16.45 26.2,4.75 27.1,3.85 SV1.16 27.15,2.15 27.7,1.6 32.2,1.6 v32.8,2.2
  Bottom 0.15: v32.8,2.2 35.4,2.2 35.7,1.9 53.3,1.9 53.8,2.4 61.8,2.4
  Bottom 0.2: 61.8,2.4 66.9,7.5 76.16,7.5 SV5.1
IO1  (via drill 0.3)
  Top 0.15: v40,34.05 40.4,34.05 41.1,33.45 41.1,30.15 42.9,28.85 46.9,28.85 48.5,27.25 52.5,27.25 56.4,23.35 56.4,3.35 57.5,2.25 57.55,2.25 59.1,0.7
  Top 0.254: SV4.4 74.06,1.06 73.7,0.7 59.1,0.7
  Bottom 0.15: v40,34.05 31,34.05 28.7,31.75 SV3.3
IO2  (via drill 0.3)
  Top 0.15: v38.4,13.95 38.4,15.8 36.7,17.5 36.7,34.95 36.4,35.25 25.8,35.25 25.1,34.55 25.1,32.75 26.1,31.75 SV3.4 | 61.8,14.2 57.35,14.2 v57.3,14.15
  Top 0.254: SV4.2 68.98,7.02 61.8,14.2
  Bottom 0.15: v38.4,13.95 38.7,14.25 42.7,14.25 42.9,14.05 44.9,14.05 45,14.15 v57.3,14.15
LASERONOFF  (via drill 0.3)
  Top 0.15: v43.4,34.25 48.5,29.15 48.5,28.35 52.1,28.35 56.8,23.55 56.7,4.35 57.6,3.45 SV1.40 | v38,34.8 38,35.7 36.4,37.3
  Top 0.2: R48.2 32.65,52.75 36.4,49 36.4,37.3
  Bottom 0.15: v43.4,34.25 43,34.65 37.9,34.65 | 37.9,34.65 31.1,34.65 29.1,32.9 28.3,32.9 27.45,32.15 27.45,30.35 27.1,30.05 26.3,29.25 26.2,29.25 SV3.6 | v38,34.8 38.1,34.85 37.9,34.65
N$1  (via drill 0.6)
  Top 0.813: T8.B v59.79,67.96 v59.8,67.95
  Bottom 0.813: v59.8,67.95 57.55,67.95 R1.1
N$2
  Bottom 0.15: U$1.11 46.95,18.6 46.6,18.25 43.55,18.25 41.85,16.8 36.8,16.8 35.55,18.05 R30.1
N$3  (via drill 0.6)
  Top 0.61: T5.B 73.95,60.45 v73.85,60.05
  Bottom 0.61: R3.3 v73.85,60.05
N$4
  Bottom 0.15: U$1.36 51.95,28.85 53,31.35 C19.1
N$5
  Bottom 0.813: R3.2 R17.1
N$6
  Bottom 0.813: B1.AC1 24.08,69.63 25.3,70.85 X2.2
N$7
  Bottom 0.813: B1.AC2 20.85,74.65 X2.1
N$8
  Top 0.61: R41.2 C16.2
N$9
  Bottom 0.61: R42.1 3.9,68.04 R2.3
N$10  (via drill 0.6)
  Top 0.61: R4.1 62.8,69.55 61.2,69.55 | T8.E 56.85,69 57.4,69.55 61.2,69.55 | T10.E 59.9,60.3 60.2,60 60.2,59 61,58.2 T9.2 62.9,58.25 v62.9,60.25 62.8,60.6 62.2,61.3 T7.E | 61.2,69.55 61.2,68.5 61.7,68 63.9,68 v64.7,67.2
  Bottom 0.61: v64.7,67.2 64.7,61.95 v62.9,60.25
N$11
  Bottom 0.15: U$1.35 51.45,30.9 51.4,31.95 C20.2
N$12  (via drill 0.6)
  Top 0.813: R2.2 7.2,67.9 8.85,66.25 12.9,66.25 13.7,65.45 13.7,58 v13.9,57.8
  Bottom 0.61: U$6.5 13.79,56.05 R43.2 13.9,56.15 v13.9,57.8
N$13  (via drill 0.6)
  Top 0.61: T1.B 47.75,60.7 v47.6,60.35
  Bottom 0.61: R8.3 v47.6,60.35
N$14
  Bottom 0.61: R8.2 R27.1
N$15  (via drill 0.6)
  Top 0.61: IC5.12 23.37,38.07 22.75,37.45 13.5,37.45 | 13.5,37.45 7.2,37.45 L5.1 | v12.85,38.2 12.85,37.5 13.5,37.45
  Bottom 0.61: v12.85,38.2 D8.C
N$16
  Bottom 0.254: R9.2 76.38,30.8 R10.2
N$17  (via drill 0.6)
  Top 0.61: v24.6,56.05 25.2,56.05 27,54.3 C6.1
  Bottom 0.61: U$6.4 v24.59,56.05 v24.6,56.05
N$18  (via drill 0.6)
  Top 0.61: v61.5,59.85 61.5,60.4 60.7,61.3 T7.B
  Bottom 0.61: v61.5,59.85 59.8,58 R12.3
N$19
  Top 0.254: R11.1 C11.2 69.8,38.95 68.74,40.01 U$2.1
N$20  (via drill 0.6)
  Top 0.813: T4.B 73.14,67.61 v73.15,67.6
  Bottom 0.813: v73.15,67.6 70.6,67.6 R15.1
N$21  (via drill 0.6)
  Top 0.61: 75.25,58.4 T6.2 | v74.65,67 74.65,69.05 | 74.65,69.05 R14.1 | T4.E 70.2,68.5 70.75,69.05 74.65,69.05 | T11.E 72.3,59.8 72.9,59.3 72.9,58.7 73.2,58.4 75.25,58.4 | T5.E 75.4,61.84 v75.4,60.3 75.25,60.15 75.25,58.4
  Bottom 0.61: v74.65,67 74.65,60.95 74.75,60.95 v75.4,60.3
N$22
  Bottom 0.61: R12.2 R6.1
N$23  (via drill 0.6)
  Top 0.61: IC5.10 20.83,42.78 v21.95,43.9
  Bottom 0.15: 8.4,35.9 13.5,35.9 15,37.1
  Bottom 0.61: 26,58.85 26,58.73 26.15,58.59 | v21.95,43.9 20.15,43.9 C17.1 26.05,43.8 28.15,45.65 28.15,57.09 28.1,57.13 26.45,58.59
  Bottom 0.813: U$6.2 26.15,58.59 26.45,58.59 | X4.2 12.5,70.5 13.37,69.63 B1.+ 14.93,69.55 16,69.55 17.85,67.7 23.9,67.7 26,65.6 26,58.85 26.65,59.5 C25.1 | D1.C 6.5,34 8.4,35.9 | 15,37.1 15,39.9 16.3,40.9 20.9,40.9 21.8,41.8 21.8,43.75 v21.95,43.9
N$24
  Bottom 0.254: R20.2 76.05,24.4 78.15,27.51 R22.2
N$25
  Bottom 0.254: R32.2 77.35,41.15 78.2,40.3 78.23,40.2 R33.2
N$26  (via drill 0.3)
  Top 0.305: U$3.2 U$3.5 U$3.6 72.25,22.04 v71.95,22.6
  Bottom 0.254: v71.95,22.6 71.95,24.05 R20.1
N$27  (via drill 0.3)
  Top 0.254: U$4.6 U$4.5 U$4.2 v67.9,32.8
  Bottom 0.305: v67.9,32.8 69.1,32.8 R9.1
N$28
  Top 0.254: C12.2 62.8,40.5 63.61,41.31 U$2.4
  Top 0.406: C12.2 R19.1
N$29  (via drill 0.3)
  Top 0.15: v56.2,27.35 56.2,42.2
  Top 0.254: 56.2,42.2 60.2,46.2 63.5,46.2 v63.6,46.1
  Bottom 0.15: U$1.37 53.85,26.5 54.8,27.35 v56.2,27.35
  Bottom 0.254: v63.6,46.1 64.9,46.1 R13.1
N$30
  Bottom 0.254: R18.2 78.25,45.05 77.4,45.9 67.3,45.9 R13.2
N$31
  Top 0.254: U$3.1 67.75,21.15 R23.1
  Top 0.305: R23.1 67.4,23.8 C9.2
N$32  (via drill 0.6)
  Top 0.61: T1.E v49.25,60.6 49.15,59.5 T3.2 49.1,58.8 47.4,58.8 46,60.3 T12.E | v48.45,68 48.45,69.55 48.5,69.6
  Top 0.813: T2.E 43.7,69.15 44.15,69.6 48.5,69.6 49.85,69.6 R16.1
  Bottom 0.61: v49.25,60.6 49.2,60.7 48.45,61.45 v48.45,68
N$33
  Top 0.254: R24.1 70.3,17.8 70.65,17.45 | C10.2 70.65,17.45 | U$3.4 72.24,19.04 70.65,17.45
N$34  (via drill 0.3)
  Top 0.15: v58.2,28.25 59.35,28.25
  Top 0.254: 59.35,28.25 60.5,27.1 R31.1
  Bottom 0.15: v58.2,28.25 57.8,28.25 57.8,27.35 57.55,27.1 | U$1.38 54,26 54.85,26.75 57.2,26.75 57.55,27.1 | R34.2 58.7,25.95 57.55,27.1
  Bottom 0.254: C4.2 58.8,24.8 R34.2
N$35  (via drill 0.3)
  Top 0.254: U$3.3 70.05,19.85 v69.4,19.2
  Bottom 0.254: v69.4,19.2 66.8,19.2 R7.2
N$36  (via drill 0.3)
  Top 0.254: U$2.2 69.14,40.66 v69.7,41.1
  Top 0.305: U$2.6 U$2.5 U$2.2
  Bottom 0.254: v69.7,41.1 70.9,41.15 R32.1
N$37  (via drill 0.3, 0.6)
  Top 0.15: 47.95,25.15 C29.1 48,25.15
  Top 0.406: 49,25 C29.1 | 49,25 C28.1 | v49,26.65 49,25 | 39.1,32.95 39.1,27.35 40.2,26.25 v40.2,22.6 | 39.1,32.95 L4.2 | 39.1,32.95 v39.8,32.95
  Bottom 0.15: 48.95,28.45 U$1.30 | 40.2,22.4 v40.2,22.6 40.25,22.5 | C26.1 48.45,32.65 | C20.1 51.25,33.65 50,33.65 50.1,33.75 | 45.15,32.95 C31.1 | R30.2 36.45,21.15
  Bottom 0.254: 48.45,28.95 U$1.29 | U$1.30 48.95,26.7 v49,26.65 | 42.25,21 U$1.13 | 48.45,28.95 48.95,28.45 | 48.45,32.65 48.45,28.95
  Bottom 0.406: C30.1 C27.1 | 42.25,21 41.6,21.2 C30.1 | 40.2,22.4 40.7,21.9 C30.1 | C30.1 40.7,20.3 | C31.1 C26.1 | C19.2 C20.1 50.2,33.7 50.2,36.9 | 48.45,32.65 49,32.65 50,33.65 | v39.8,32.95 45.15,32.95 | 36.45,21.15 37.7,22.5 40.25,22.5
  Bottom 0.61: 50.2,36.9 C5.1
N$38
  Top 0.254: U$4.1 67.1,32.15 67.55,31.8 68.55,31.8 68.95,32.1 68.95,33.2 67.95,34.1 67.35,34.1 66,35.45 C3.2 R26.1
N$39
  Top 0.254: U$4.4 64.1,33.45 63.5,32.9 63.5,30.85 64.5,29.85 C8.2
  Top 0.406: R28.1 C8.2
N$40
  Top 0.254: U$2.3 R5.2
N$41  (via drill 0.7)
  Top 0.813: T2.B 46.74,67.86 v46.75,67.85
  Bottom 0.813: v46.75,67.85 44,67.85 R25.1
N$42
  Top 0.254: R39.2 80.35,54.35 82.9,51.8 82.9,47.72 JP1.2
  Top 0.61: T6.1 77.1,56.8 | R39.2 78.35,54.95 T6.1 | T5.C 76.95,56.95 T6.1
N$43
  Top 0.254: U$5.6 7.15,26.05 7.7,25.5 8.2,25.5 8.7,25 R37.1
  Top 0.406: U$5.6 U$5.5
N$44
  Top 0.254: R37.2 6.15,23.75 5.4,24.5 5.4,29.3 6.5,30.4 7.84,30.4 LED2.C
  Top 0.406: LED2.C 8.12,30.38 8.8,29.7 8.8,27.95 U$5.3
N$45
  Top 0.254: U$5.4 7.7,27.9 8.35,27.25 U$5.2 9.35,27.25 9.7,27.6 9.7,29 10.2,29.5 R21.2
N$46
  Top 0.254: R29.2 64.08,53.95 JP4.2
  Top 0.61: R29.2 T9.1 64.75,60.99 T7.C
N$47
  Top 0.406: LED5.C 3.65,24.9 R38.2
N$48
  Top 0.254: R40.2 51.55,55.55 46.8,50.8 46.8,49.47 JP2.2
  Top 0.61: T1.C 50.85,59.8 T3.1 52.3,56.7 R40.2
N$49  (via drill 0.3)
  Top 0.254: U$4.3 66.23,34.17 65.85,34.55 v64.55,34.55
  Bottom 0.254: v64.55,34.55 63.4,34.55 R44.2
N$50
  Bottom 0.61: U$6.1 24.11,59.85 24.6,60.35 24.6,64.45 23.5,65.5 C7.1
N$51
  Bottom 0.61: U$6.8 16.6,59.85 16.4,60.05 16.4,64.75 17.15,65.5 C7.2
  Bottom 0.813: L2.1 10.91,64.6 D3.1 14.57,61.43 16.15,59.85 16.6,59.85
N$52  (via drill 0.6)
  Top 0.61: v15.9,57.3 15.85,57.3 13.45,55.2 C16.1 C14.1
  Bottom 0.61: U$6.6 15.91,57.31 v15.9,57.3
N$53  (via drill 0.6)
  Top 0.61: v44.1,57.5 44.1,57.79 T12.B
  Bottom 0.61: R45.1 43.1,56.5 v44.1,57.5
N$54  (via drill 0.6)
  Top 0.61: v57.6,57.4 58.4,58.2 58.4,58.39 T10.B
  Bottom 0.61: R47.1 57.2,57 v57.6,57.4
N$55  (via drill 0.6)
  Top 0.61: v71.1,57 71.6,57.89 T11.B
  Bottom 0.61: R46.1 70.3,56.2 v71.1,57
N$56
  Top 0.61: T10.C 58.1,61.8 57.7,62.2 55.2,62.2 54.8,62.6 54.8,66.7 55.3,67.2 55.3,67.91 T8.C
  Top 0.813: T8.C 55.35,70.95 | 55.35,70.95 55.35,73.95 X5.2 | D4.A 55.4,70.9 55.35,70.95
N$58  (via drill 0.3)
  Top 0.2: v25.8,57.3 27.25,57.3 | 27.9,57.35 R48.1
  Top 0.406: 27.25,57.3 R35.2 27.9,57.35
  Bottom 0.2: U$6.3 25.79,57.31
  Bottom 0.406: 25.79,57.31 v25.8,57.3
N$82
  Top 0.61: T11.C 70.9,61.3 70.5,61.7 68.4,61.7 67.9,62.2 67.9,65.8 68.7,66.6 T4.C
  Top 0.813: T4.C 68.7,70.45 | 68.7,70.45 68.7,74.55 X1.2 | D2.A 68.8,70.35 68.7,70.45
N$84
  Top 0.61: T12.C 44.3,61.8 44.1,62 42.4,62 41.6,62.8 41.6,66.3 42.2,66.9 T2.C
  Top 0.813: T2.C 42.2,71.05 | 42.2,71.05 42.2,73.65 X3.2 | D5.A 42.25,71.1 42.2,71.05
VDD_EXT5V  (via drill 0.6)
  Top 0.61: v16.8,38.6 16.8,40.1 14.5,42.4 D6.C
  Bottom 0.15: SV2.2 15.91,35.31 16.8,36.2 v16.8,38.6
VDD_LASERSUPPLY  (via drill 0.3, 0.6)
  Top 0.15: 62.4,28.1 58,32.5 v58,38.7
  Top 0.254: LED2.A 7.86,34.44 v6.2,36.1 | 62.4,28.1 R31.2 | v54.7,38.7 54.7,54.1 55.4,54.8
  Top 0.406: 71.3,54.55 T6.3 | C22.1 67.95,54.65 66.3,56.1 66.3,71.4 65.05,72.65 59.95,72.65 | 47,73.3 51.85,73.3 53.15,72 53.15,58.3 53.8,57.65 53.8,56.25 55.25,54.8 55.4,54.8 C13.1 62.9,54.8 63.8,55.7 T9.3 | T3.3 49.7,56.5 48.7,55.5 C15.1 42.8,55.5 34,64.3 34,65.35 34.1,65.45
  Top 0.61: C22.1 71.3,54.55 | 46.8,73.5 47,73.3 | T6.3 75.55,54.5
  Top 0.813: D5.C 46.8,73.5 46.8,74.75 X3.1 | D4.C 59.95,72.65 59.95,75.05 X5.1 | D2.C 73.05,75.4 X1.1 | v15.55,54.15 15.65,54.15 15.65,54.75 17.65,56.75 17.65,58.6 16.25,60 16.25,64.2 17.5,65.45 34.1,65.45 34.5,65.45 | v36.35,72.4 34.5,70.75 34.5,65.45 | 34.5,65.45 34.35,65.5
  Bottom 0.254: v6.2,36.1 6.2,53.3 6.72,53.83 | v54.7,38.7 v58,38.7
  Bottom 0.406: 6.72,53.83 L2.2
  Bottom 0.813: 48,72.4 C36.1 v36.35,72.4 | 48,72.4 C37.1 49.6,72.05 C38.1 58.5,71.95 60.75,71.95 | X3.1 48.05,72.45 48,72.4 | 60.75,71.95 C39.1 62.7,72 C2.1 70.95,72.05 73.15,72.05 | X5.1 60.8,72 60.75,71.95 | 73.15,72.05 C1.1 | X1.1 73.55,72.45 73.15,72.05 | R43.1 13.55,54.3 L2.2 13.6,54.3 13.75,54.15 v15.55,54.15
VSYNC  (via drill 0.3)
  Top 0.15: v30.2,30.75 30,30.75 29.8,30.55 25.75,30.55 23.55,32.75 18.05,32.75 17.25,31.95 17.25,30.8 16.85,30.4 14.55,30.4 13.85,29.7 13.85,15.7 18.1,11.8 18.15,2.95 18.55,2.55 23.38,2.55 SV1.14
  Bottom 0.15: v30.2,30.75 30.2,29.75 29.7,29.25 28.6,29.25 SV3.5 | 79.3,8.6 53.4,8.6 52.6,9.4 49.6,9.4 48.8,8.6 21.3,8.6 20.5,7.8 20.5,7.2 20.9,6.7 20.9,5.7 21.5,5.1 23.29,5.1 SV1.14
  Bottom 0.2: SV6.1 80.49,7.41 79.3,8.6
VU
  Bottom 0.813: D1.A 6.5,4.9 6.6,4.9 8.2,3.3 9.29,3.3 SV1.2

## Text on the board
Top: Tripple channel 330Mhz currentsource Rev1.1 | das-labor.org | by siro 2011